# Altium PCB LPRAN.PcbDoc (part 2 of 3)
Units mil, origin at the board's own origin, x right, y up, seen from the top; angles counter-clockwise.
Board outline 3200 x 1800 mil, 4 copper layers (Component Side, Ground Plane, Power Plane, Solder Side), stack 58 mil thick; 140 components, 132 nets, 550 pads, 376 vias.
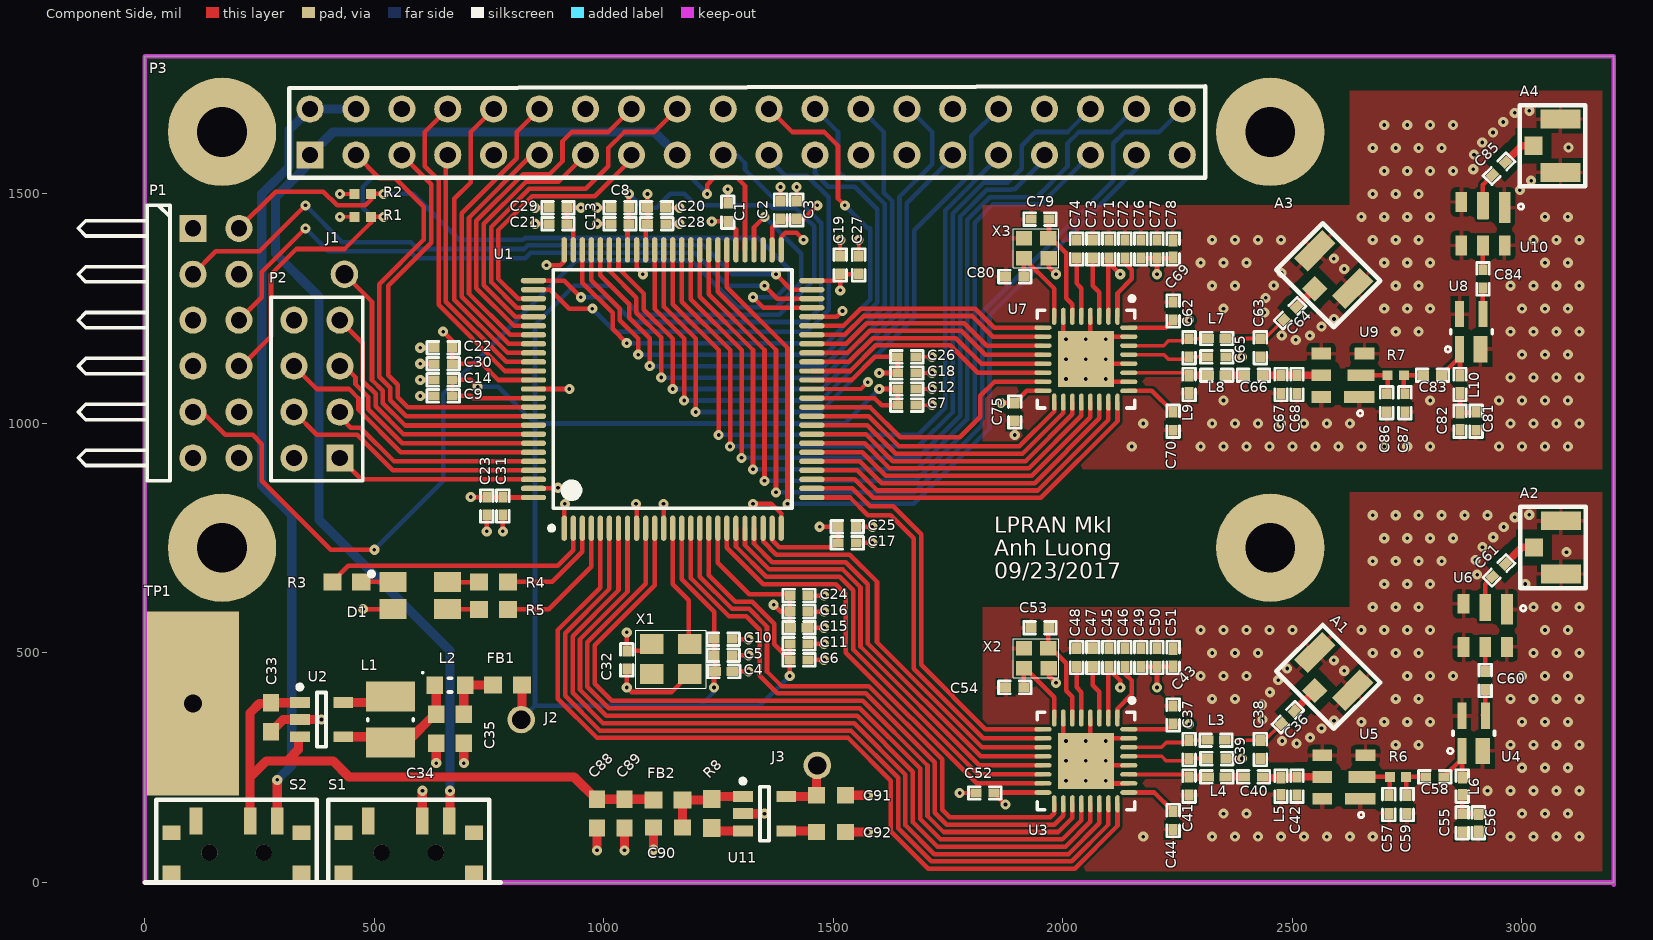
[diagram p0: Component Side view]

## Part data (continued)
L8: "FIXED IND 39NH 300MA 650 MOHM", DC Resistance (DCR)="650 mOhm Max", Manufacturer="Murata Electronics North America", Operating Temperature="-55°C ~ 125°C", Package / Case="0402 (1005 Metric)", Q @ Freq="8 @ 100MHz", Ratings=-, Supplier Part Number 1=490-2630-1-ND, Tolerance=±5%, Category="Inductors, Coils, Chokes", ComponentLink1Description=http://search.murata.co.jp/Ceramy/image/img/P02/JELF243B-0010.pdf, ComponentLink1URL=http://search.murata.co.jp/Ceramy/image/img/P02/JELF243B-0010.pdf, Height - Seated (Max)="0.022\" (0.55mm)", Manufacturer Part Number=LQG15HS39NJ02D, Material - Core=-, Mounting Type="Surface Mount", Packaging="Cut Tape (CT)", Part Status=Active, Pricing 1="1=0.1, 10=0.066, 100=0.0442, 500=0.0368, 1000=0.03091, 2500=0.0265 (USD)", RoHS="RoHS Compliant", Shielding=Unshielded, Size / Dimension="0.039\" L x 0.020\" W (1.00mm x 0.50mm)", Stock 1=33416, Supplier 1=Digi-Key, Supplier Device Package="0402 (1005 Metric)", Type=Multilayer
L9: "FIXED IND 82NH 200MA 1.2 OHM SMD", DC Resistance (DCR)="1.2 Ohm Max", Manufacturer="Murata Electronics North America", Operating Temperature="-55°C ~ 125°C", Package / Case="0402 (1005 Metric)", Q @ Freq="8 @ 100MHz", Ratings=-, Supplier Part Number 1=490-2634-1-ND, Tolerance=±5%, Category="Inductors, Coils, Chokes", ComponentLink1Description=http://search.murata.co.jp/Ceramy/image/img/P02/JELF243B-0010.pdf, ComponentLink1URL=http://search.murata.co.jp/Ceramy/image/img/P02/JELF243B-0010.pdf, Height - Seated (Max)="0.022\" (0.55mm)", Manufacturer Part Number=LQG15HS82NJ02D, Material - Core=-, Mounting Type="Surface Mount", Packaging="Cut Tape (CT)", Part Status=Active, Pricing 1="1=0.1, 10=0.071, 100=0.0476, 500=0.03968, 1000=0.03333, 2500=0.02857 (USD)", RoHS="RoHS Compliant", Shielding=Unshielded, Size / Dimension="0.039\" L x 0.020\" W (1.00mm x 0.50mm)", Stock 1=68942, Supplier 1=Digi-Key, Supplier Device Package="0402 (1005 Metric)", Type=Multilayer
P1: "Header, 6-Pin, Dual row, Right Angle", LatestRevisionDate=17-Jul-2002, LatestRevisionNote="Re-released for DXP Platform.", Publisher="Altium Limited"
P2: "Header, 4-Pin, Dual row", LatestRevisionDate=17-Jul-2002, LatestRevisionNote="Re-released for DXP Platform.", Publisher="Altium Limited"
P3: library part "Raspberry Pi Zero Mate", "The header and mechanical drawings for connnecting a Raspbery Pi Zero"
R1 R2: "RES SMD 1K OHM 1% 1/16W 0402", Manufacturer="Rohm Semiconductor", Operating Temperature="-55°C ~ 155°C", Package / Case="0402 (1005 Metric)", Power (Watts)="0.063W, 1/16W", Supplier Device Package=0402, Supplier Part Number 1=RHM1.00KCDCT-ND, Temperature Coefficient=±100ppm/°C, Tolerance=±1%, Category=Resistors, ComponentLink1Description=http://rohmfs.rohm.com/en/products/databook/datasheet/passive/resistor/chip_resistor/mcr_g.pdf, ComponentLink1URL=http://rohmfs.rohm.com/en/products/databook/datasheet/passive/resistor/chip_resistor/mcr_g.pdf, Composition="Thick Film", Failure Rate=-, Features=-, Height - Seated (Max)="0.016\" (0.40mm)", Manufacturer Part Number=MCR01MRTF1001, Packaging="Cut Tape (CT)", Part Status="Discontinued at Digi-Key", Pricing 1="1=0.1, 10=0.032, 100=0.0132, 1000=0.00593, 2500=0.00515, 5000=0.00425 (USD)", RoHS="RoHS Compliant", Size / Dimension="0.039\" L x 0.020\" W (1.00mm x 0.50mm)", Stock 1=157533, Supplier 1=Digi-Key
R3 R4 R5: "RES 330 OHM 1/10W 5% 0603 SMD", Manufacturer="Rohm Semiconductor", Package / Case="0603 (1608 Metric)", Power (Watts)="0.1W, 1/10W", Resistance (Ohms)=330, Temperature Coefficient=±200ppm/°C, Tolerance=±5%, Category=Resistors, ComponentLink1Description=http://rohmfs.rohm.com/en/products/databook/datasheet/passive/resistor/chip_resistor/mcr_g.pdf, ComponentLink1URL=http://rohmfs.rohm.com/en/products/databook/datasheet/passive/resistor/chip_resistor/mcr_g.pdf, Composition="Thick Film", Features=-, Height="0.022\" (0.55mm)", Manufacturer Part Number=MCR03ERTJ331, Number of Terminations=2, Packaging=Digi-Reel®, Pricing 1="1=0.1, 10=0.013, 25=0.0092, 100=0.0052, 250=0.00396, 500=0.00316, 1000=0.00233 (USD)", RoHS="RoHS Compliant", Size / Dimension="0.063\" L x 0.031\" W (1.60mm x 0.80mm)", Stock 1=12878, Supplier 1=Digi-Key, Supplier Device Package="0603 (1608 Metric)"
R6 R7: "RES SMD 0 OHM JUMPER 1/5W 0402", Manufacturer="Rohm Semiconductor", Operating Temperature="-55°C ~ 155°C", Package / Case="0402 (1005 Metric)", Power (Watts)="0.2W, 1/5W", Supplier Device Package=0402, Supplier Part Number 1=RHM1692-1-ND, Temperature Coefficient="0/ +200ppm/°C", Tolerance=Jumper, Category=Resistors, ComponentLink1Description=http://www.rohm.com/web/global/datasheet/PMR01ZZPJ000/pmr-jpw-e, ComponentLink1URL=http://www.rohm.com/web/global/datasheet/PMR01ZZPJ000/pmr-jpw-e, Composition="Thick Film", Failure Rate=-, Features="Automotive AEC-Q200, Current Sense", Height - Seated (Max)="0.014\" (0.35mm)", Manufacturer Part Number=PMR01ZZPJ000, Packaging="Cut Tape (CT)", Part Status=Active, Pricing 1="1=1.17, 10=1.016, 25=0.8932, 50=0.8162, 100=0.7084, 250=0.616, 500=0.51128, 1000=0.4158, 5000=0.3967 (USD)", RoHS="RoHS Compliant", Size / Dimension="0.039\" L x 0.020\" W (1.00mm x 0.50mm)", Stock 1=89225, Supplier 1=Digi-Key
R8: "RES SMD 10K OHM 1% 1/10W 0603", Manufacturer="Rohm Semiconductor", Operating Temperature="-55°C ~ 155°C", Package / Case="0603 (1608 Metric)", Power (Watts)="0.1W, 1/10W", Resistance (Ohms)=10k, Supplier Part Number 1=RHM10.0KCFDKR-ND, Temperature Coefficient=±100ppm/°C, Tolerance=±1%, Category=Resistors, ComponentLink1Description=http://rohmfs.rohm.com/en/products/databook/datasheet/passive/resistor/chip_resistor/mcr_g.pdf, ComponentLink1URL=http://rohmfs.rohm.com/en/products/databook/datasheet/passive/resistor/chip_resistor/mcr_g.pdf, Composition="Thick Film", Features=-, Height="0.022\" (0.55mm)", Manufacturer Part Number=MCR03ERTF1002, Number of Terminations=2, Packaging=Digi-Reel®, Pricing 1="1=0.1, 10=0.022, 25=0.016, 100=0.0089, 250=0.0068, 500=0.00542, 1000=0.00399 (USD)", RoHS="RoHS Compliant", Size / Dimension="0.063\" L x 0.031\" W (1.60mm x 0.80mm)", Stock 1=30590, Supplier 1=Digi-Key, Supplier Device Package="0603 (1608 Metric)"
S1 S2: "SWITCH SLIDE SPDT 300MA 4V", Current Rating="300mA (DC)", Manufacturer="Apem Inc.", Operating Force=200gf, Operating Temperature="-10°C ~ 60°C", Supplier Part Number 1=679-3555-ND, Voltage Rating - AC=-, Voltage Rating - DC=4V, Actuator Length=1.50mm, Actuator Material="Liquid Crystal Polymer (LCP)", Actuator Type=Standard, Category=Switches, Circuit=SPDT, ComponentLink1Description=http://www.apem.com/files/apem/brochures/MA_MICRO_SLIDE.pdf, ComponentLink1URL=http://www.apem.com/files/apem/brochures/MA_MICRO_SLIDE.pdf, Contact Finish=Silver, Contact Material="Beryllium Copper", Contact Timing="Not Specified", Electrical Life="10,000 Cycles", Features="Board Guide", Manufacturer Part Number=MA12R, Mechanical Life=-, Mounting Type="Surface Mount, Right Angle", Packaging=Tube, Part Status=Active, Pricing 1="1=0.86, 50=0.7224, 100=0.688, 500=0.5676, 1000=0.5504, 5000=0.4816 (USD)", RoHS="RoHS Compliant", Stock 1=235, Supplier 1=Digi-Key, Switch Function=On-On, Switch Travel=1.50mm, Termination Style="Gull Wing"
U1: "IC FPGA 68 I/O 100VQFP", Manufacturer="Microsemi SoC", Operating Temperature="0°C ~ 70°C", Package / Case=100-TQFP, Supplier Device Package="100-VQFP (14x14)", Supplier Part Number 1=AGL250V2-VQ100-ND, Voltage - Supply="1.14 V ~ 1.575 V", Category="Integrated Circuits (ICs)", ComponentLink1Description=http://www.microsemi.com/document-portal/doc_download/130694-igloo-low-power-flash-fpgas-datasheet, ComponentLink1URL=http://www.microsemi.com/document-portal/doc_download/130694-igloo-low-power-flash-fpgas-datasheet, Manufacturer Part Number=AGL250V2-VQ100, Mounting Type="Surface Mount", Number of Gates=250000, Number of I/O=68, Number of LABs/CLBs=-, Number of Logic Elements/Cells=6144, Pricing 1="90=21.59 (USD)", RoHS="RoHS non-compliant", Stock 1=0, Supplier 1=Digi-Key, Total RAM Bits=36864
U2: "IC REG BUCK 1.5V 0.6A SYNC SOT23", Current - Output=600mA, Frequency - Switching=2MHz, Manufacturer="Texas Instruments", Operating Temperature="-40°C ~ 85°C (TA)", Package / Case="SC-74A, SOT-753", Supplier Device Package=SOT-23-5, Supplier Part Number 1=LM3671MF-1.5/NOPBCT-ND, Voltage - Input (Max)=5.5V, Voltage - Input (Min)=2.7V, Voltage - Output (Max)=-, Voltage - Output (Min/Fixed)=1.5V, Category="Integrated Circuits (ICs)", ComponentLink1Description=http://www.ti.com/lit/ds/symlink/lm3671.pdf, ComponentLink1URL=http://www.ti.com/lit/ds/symlink/lm3671.pdf, Function=Step-Down, Manufacturer Part Number=LM3671MF-1.5/NOPB, Mounting Type="Surface Mount", Number of Outputs=1, Output Configuration=Positive, Output Type=Fixed, Packaging="Cut Tape (CT)", Part Status=Active, Pricing 1="1=1.47, 10=1.313, 100=1.0234, 500=0.84542 (USD)", RoHS="RoHS Compliant", Stock 1=845, Supplier 1=Digi-Key, Synchronous Rectifier=Yes, Topology=Buck
U3 U7: "IC RF TXRX 802.15.4 32WFQFN", Current - Receiving=20mA, Current - Transmitting=58mA, Frequency="862Mhz ~ 1.02GHz", Manufacturer="Semtech Corporation", Operating Temperature="-40°C ~ 85°C", Package / Case="32-WFQFN Exposed Pad", Power - Output=8dBm, Supplier Part Number 1=SX1257IWLTRTCT-ND, Voltage - Supply="2.7 V ~ 3.6 V", Category="RF/IF and RFID", ComponentLink1Description=http://www.semtech.com/images/datasheet/sx1257.pdf, ComponentLink1URL=http://www.semtech.com/images/datasheet/sx1257.pdf, Data Rate (Max)=-, Manufacturer Part Number=SX1257IWLTRT, Memory Size=-, Modulation="FHSS, FSK, OFDM, O-QPSK", Packaging="Cut Tape (CT)", Part Status=Active, Pricing 1="1=7.56, 10=6.93, 25=6.3, 100=5.67, 250=5.19752, 500=4.725, 1000=4.2525 (USD)", Protocol=-, RF Family/Standard=802.15.4, RoHS="RoHS Compliant", Sensitivity=-, Serial Interfaces=SPI, Stock 1=3538, Supplier 1=Digi-Key, Type="TxRx Only"
U4 U8: "SPF5043Z; Low Noise Amplifier; RFMD", Current - Supply=46mA, Frequency="50MHz ~ 4GHz", Manufacturer=RFMD, Package / Case="SC-82A, SOT-343", Supplier Device Package=SOT-343, Supplier Part Number 1=689-1101-1-ND, Test Frequency=1.9GHz, Voltage - Supply="3 V ~ 5 V", Category="RF/IF and RFID", ComponentLink1Description=http://www.rfmd.com/store/downloads/dl/file/id/27713/spf5043z_data_sheet.pdf, ComponentLink1URL=http://www.rfmd.com/store/downloads/dl/file/id/27713/spf5043z_data_sheet.pdf, Gain=12.9dB, Manufacturer Part Number=SPF5043Z, Noise Figure=0.8dB, P1dB=22.7dB, Packaging="Cut Tape (CT)", Part Status="Discontinued at Digi-Key", Pricing 1="1=2.73, 10=2.47, 25=2.2052, 100=1.9845 (USD)", RF Type="Cellular, ISM, PCS", RoHS="RoHS Compliant", Stock 1=12, Supplier 1=Digi-Key
U5 U6 U9 U10: "SAW Filter - Bandpass - TEMEX type"
U11: "IC REG LDO 3V 0.1A SOT23-5", Current - Limit (Min)=-, Current - Output=100mA, Manufacturer="Fairchild Semiconductor", Operating Temperature="-40°C ~ 125°C", Package / Case="SC-74A, SOT-753", Supplier Device Package=SOT-23-5, Voltage - Dropout (Typical)="0.1V @ 100mA", Voltage - Input="Up to 6.5V", Voltage - Output=3V, Category="Integrated Circuits (ICs)", ComponentLink1Description=http://www.fairchildsemi.com/ds/FA/FAN2500.pdf, ComponentLink1URL=http://www.fairchildsemi.com/ds/FA/FAN2500.pdf, Manufacturer Part Number=FAN2500S30X, Mounting Type="Surface Mount", Number of Regulators=1, Packaging="Tape & Reel (TR)", Pricing 1="3000=0.25462, 6000=0.23706, 15000=0.22828, 30000=0.2195, 75000=0.21599, 150000=0.21072 (USD)", Regulator Topology="Positive Fixed", RoHS="RoHS Compliant", Stock 1=6000, Supplier 1=Digi-Key
X1: "Standard Clock Oscillators 32.000M 3.3V 50ppm", Frequency="32 MHz", Frequency Stability="50 PPM", Load Capacitance="15 pF", Manufacturer=ABRACON, Maximum Operating Temperature="+ 85 C", Minimum Operating Temperature="- 40 C", Operating Supply Voltage="3.3 V", Package / Case="3.2 mm x 2.5 mm", Supplier Part Number 1=815-ASE-32.000MLCT, Brand=ABRACON, Category="Standard Clock Oscillators", ComponentLink1Description=http://www.mouser.com/ds/2/3/ASEseries-38758.pdf, ComponentLink1URL=http://www.mouser.com/ds/2/3/ASEseries-38758.pdf, Height="1 mm", Length="3.2 mm", Manufacturer Part Number=ASE-32.000MHZ-L-C-T, Minimum Order Quantity=1000, Mounting Style=SMD/SMT, Output Format=CMOS, Packaging=Reel, Pricing 1="1000=0.959, 2000=0.910, 5000=0.878, 10000=0.845 (USD)", Product="Standard Clock Oscillators", Reeling=True, RoHS="RoHS Compliant", RoHS - Mouser=Y, Series=ASE, Standard Pack Qty=1000, Stock 1=0, Supplier 1=Mouser, Termination Style=SMD/SMT, Type="XO - Crystal Clock Oscillators", Width="2.5 mm"
X2 X3: "CRYSTAL 36.0000MHZ 10PF SMD", ESR (Equivalent Series Resistance)="80 Ohm", Frequency=36MHz, Frequency Stability=±20ppm, Load Capacitance=10pF, Manufacturer="Abracon LLC", Operating Mode=Fundamental, Operating Temperature="-40°C ~ 85°C", Package / Case="4-SMD, No Lead", Ratings=-, Supplier Part Number 1=535-10947-1-ND, Category="Crystals, Oscillators, Resonators", ComponentLink1Description=http://www.abracon.com/Resonators/ABM11.pdf, ComponentLink1URL=http://www.abracon.com/Resonators/ABM11.pdf, Frequency Tolerance=±20ppm, Height - Seated (Max)="0.023\" (0.59mm)", Manufacturer Part Number=ABM11-36.000MHZ-D2X-T3, Mounting Type="Surface Mount", Packaging="Cut Tape (CT)", Part Status="Discontinued at Digi-Key", Pricing 1="1=1.36, 10=1.301, 50=1.2706, 100=1.089, 500=1.05876, 1000=0.89238 (USD)", RoHS="RoHS Compliant", Size / Dimension="0.079\" L x 0.063\" W (2.00mm x 1.60mm)", Stock 1=2790, Supplier 1=Digi-Key, Type="MHz Crystal"

## Via types
v1: diameter 22, hole 8, Component Side to Solder Side, tented both sides, 242 vias
v2: diameter 22, hole 8, Component Side to Solder Side, 133 vias
v3: diameter 60, hole 40.16, Component Side to Solder Side, tented both sides, 1 vias

## Nets (pads, with @x,y where several pads share a name; then routed paths per layer and width w, separated by ;. In a path a pad name is that pad's centre, name@x,y a point inside that pad or via, vN(x,y) a via of type N, cw(c..) or ccw(c..) an arc to the next point about the centre after c; other vN are vias at no path point)
BCM_1: P3.28 U1.69 | length 1412.5
  Component Side w10: U1.69@1031.89,1378.15 1031.89,1338.11 1087,1283 1087,1248 1150,1185 v2(1150,1075)
  Solder Side w10: v2(1150,1075) 1475.51,1075 1644,1243.49 1644,1494 1715,1565 1715,1635 1665,1685 P3.28@1660,1685
BCM_2: P3.3 U1.91 | length 992.6
  Component Side w10: P3.3@460,1585 511,1534 546,1534 608,1472 608,1400.63 511,1303.63 511,1101.37 534.75,1077.62 534.75,1050.76 569.56,1015.94 U1.91@846.85,1015.94
BCM_3: P3.5 U1.90 | length 906.8
  Component Side w10: P3.5@560,1585 624,1521 624,1394 530,1300 530,1105 550.75,1084.25 550.75,1057.39 572.51,1035.63 U1.90@846.85,1035.63
BCM_4: P3.7 U1.85 | length 566.5
  Component Side w10: P3.7@660,1585 656,1581 656,1265.35 787.3,1134.06 U1.85@846.85,1134.06
BCM_5: P3.29 U1.65 | length 1301.8
  Component Side w10: U1.65@1110.63,1378.15 1110.63,1249.37 1175,1185 v2(1175,1050)
  Solder Side w10: v2(1175,1050) 1473.14,1050 1660,1236.86 1660,1480 P3.29@1760,1580
BCM_6: P3.31 U1.63 | length 1564.1
  Component Side w10: U1.63@1150,1378.15 1150,1260 1250,1160 v2(1250,975)
  Solder Side w10: v2(1250,975) 1685,975 1744,1034 1744,1464 P3.31@1865,1585
BCM_12: P3.32 U1.64 | length 1473.8
  Component Side w10: U1.64@1130.32,1378.15 1130.32,1254.69 1200,1185 v2(1200,1025)
  Solder Side w10: v2(1200,1025) 1470.76,1025 1676,1230.24 1676,1421 1800,1545 1800,1550 ; 1800.53,1550 1800.53,1625.53 P3.32@1860,1685
BCM_13: P3.33 U1.61 | length 1694.7
  Component Side w10: U1.61@1189.37,1378.15 1189.37,1270.63 1300,1160 v2(1300,925)
  Solder Side w10: v2(1300,925) 1684.49,925 1776,1016.51 1776,1450.75 1834.25,1509 1886.63,1509 1887.63,1510 1895,1510 1965,1580 P3.33@1965,1585
BCM_14: P3.8 U1.86 | length 726.1
  Component Side w10: P3.8@660,1685 610,1635 610,1560 640,1530 640,1258.73 784.36,1114.37 U1.86@846.85,1114.37
BCM_15: P3.10 U1.84 | length 671.4
  Component Side w10: P3.10@760,1685 710,1635 710,1525 674.32,1489.31 674.32,1269.67 790.24,1153.74 U1.84@846.85,1153.74
BCM_22: P3.15 U1.78 | length 564.3
  Component Side w10: U1.78@846.85,1271.85 813.15,1271.85 770.32,1314.69 770.32,1421.43 843.89,1495 980,1495 1060,1575 P3.15@1060,1585
BCM_23: P3.16 U1.81 | length 769.2
  Component Side w10: U1.81@846.85,1212.8 804.32,1212.8 722.32,1294.8 722.32,1441.31 824.01,1543 881.63,1543 910,1571.37 910,1615 930,1635 1010,1635 P3.16@1060,1685
BCM_24: P3.18 U1.79 | length 771.2
  Component Side w10: U1.79@846.85,1252.17 810.21,1252.17 754.32,1308.06 754.32,1428.06 837.26,1511 961,1511 1010,1560 1010,1600 1045,1635 1110,1635 P3.18@1160,1685
BCM_25: P3.22 U1.73 | length 1362.7
  Component Side w10: U1.73@953.15,1378.15 953.15,1306.85 1019,1241 1019,1206 v2(1050,1175) ; P3.22@1360,1685 1410,1635 1480,1635 1510,1605 1510,1490 v2(1525,1475)
  Solder Side w10: v2(1050,1175) 1485,1175 1580,1270 1580,1425 1575,1425 v2(1525,1475)
BCM_26: P3.37 U1.57 | length 1847.8
  Component Side w10: U1.57@1268.11,1378.15 1268.11,1296.89 1400,1165 v2(1400,825)
  Solder Side w10: v2(1400,825) 1675,825 1840,990 1840,1235 2165,1560 2165,1575 2160,1580 P3.37@2160,1585
BCM_27: P3.13 U1.80 | length 554.3
  Component Side w10: U1.80@846.85,1232.48 807.26,1232.48 738.32,1301.43 738.32,1434.68 830.63,1527 902,1527 P3.13@960,1585
BLUE: R5.2 U1.4 | length 312.9
  Component Side w10: R5.2@786.5,585 796.5,595 880,595 972.83,687.83 U1.4@972.83,771.85